# Altium PCB PCB - V-Groove.PcbDoc
Units mm, origin at the board's own origin, x right, y up, seen from the top; angles counter-clockwise.
Board outline 220 x 220 mm, 6 copper layers (Top Layer, (Inserted) Layer 2, (Inserted) Layer 3, (Inserted) Layer 4, (Inserted) Layer 5, Bottom Layer); 8 components, 0 nets, 12 pads, 0 vias.
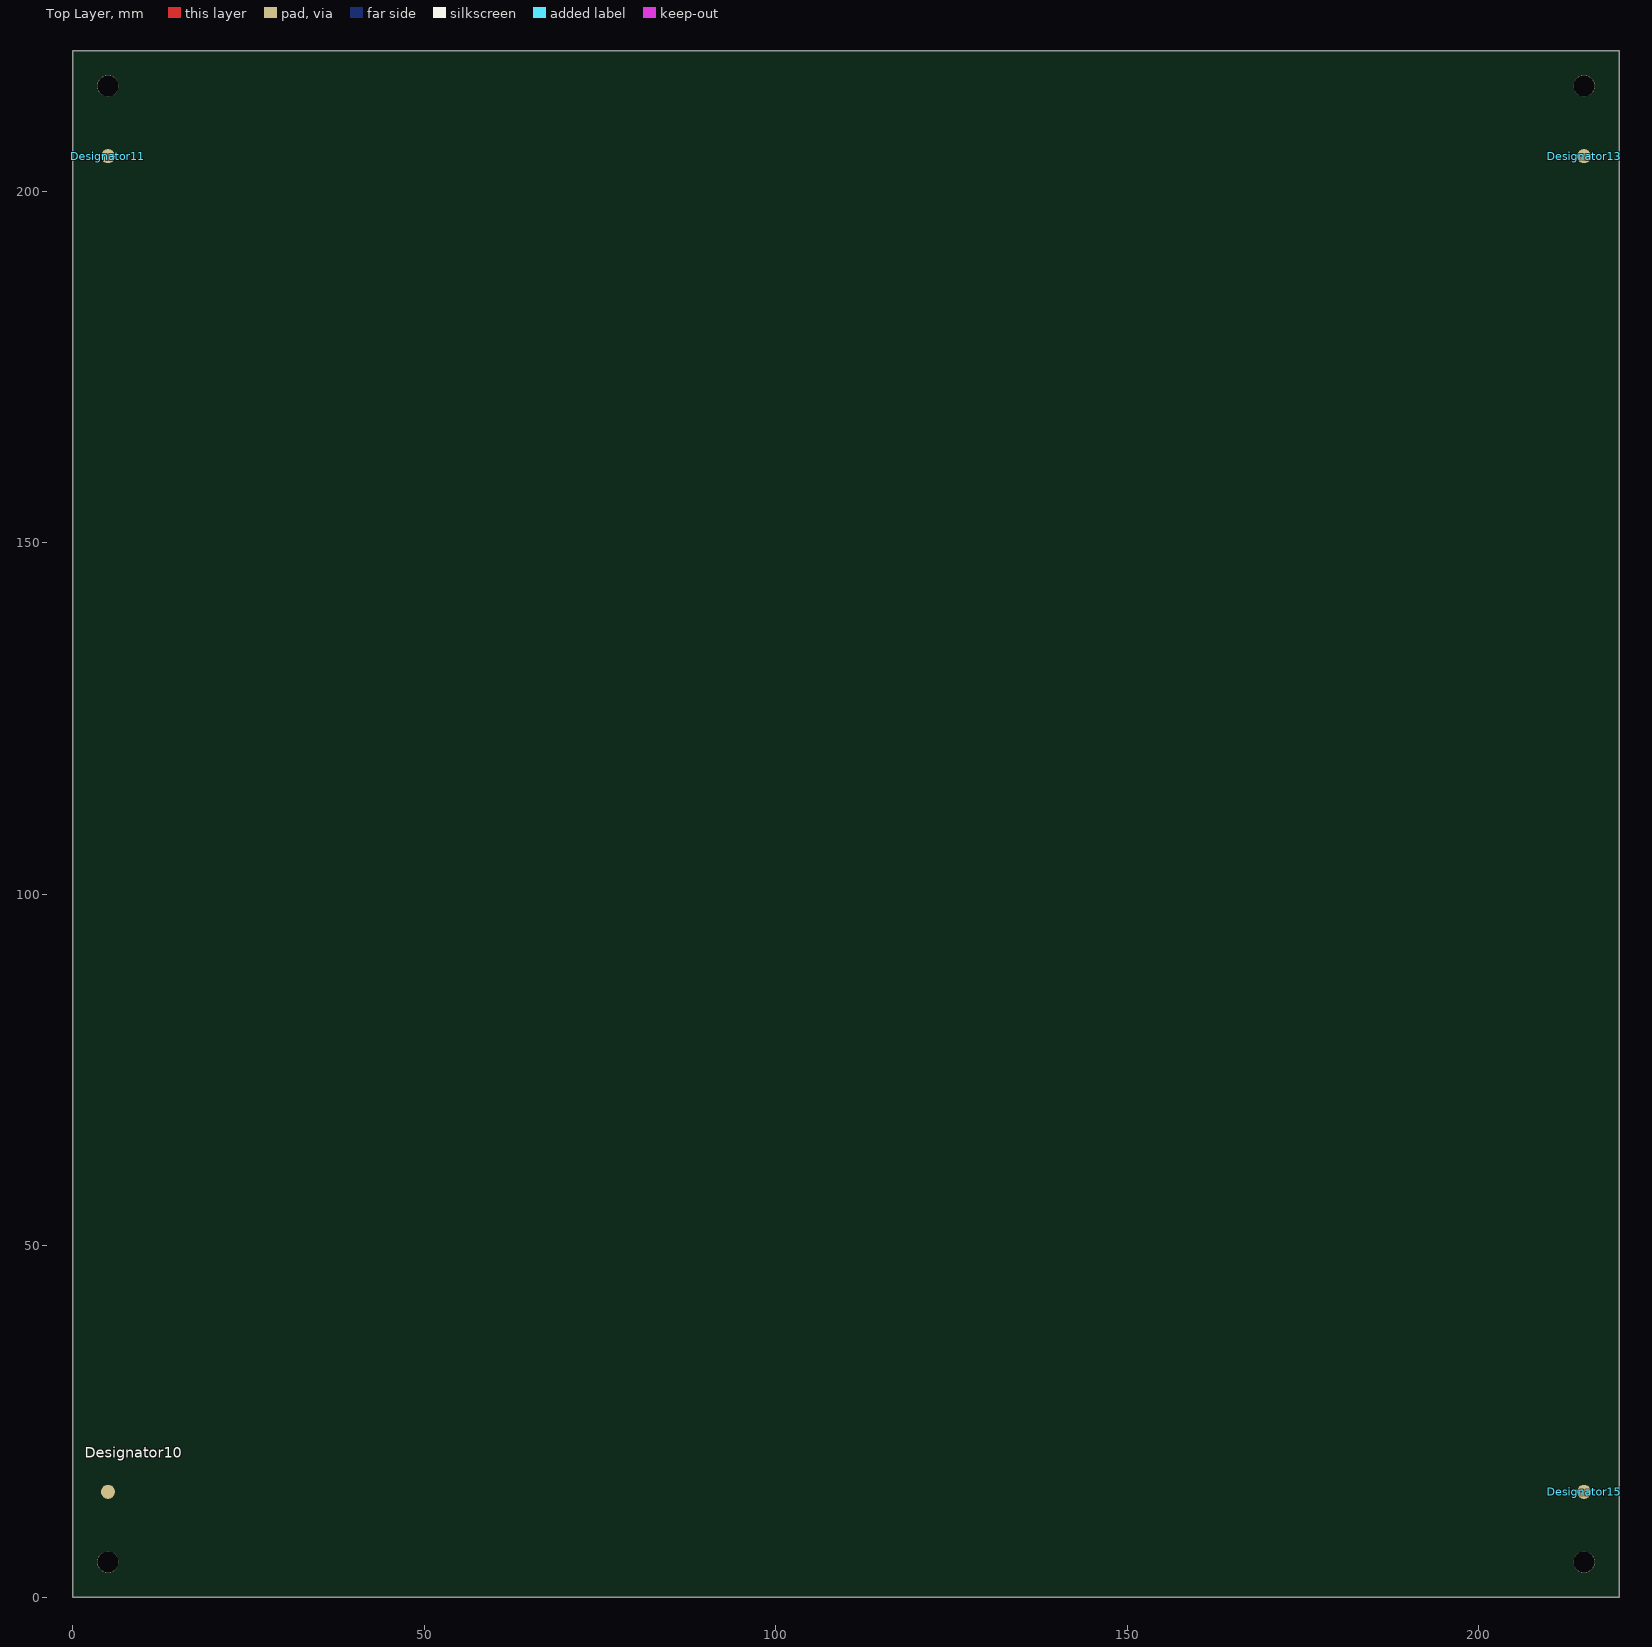
[diagram p0: Top Layer view]
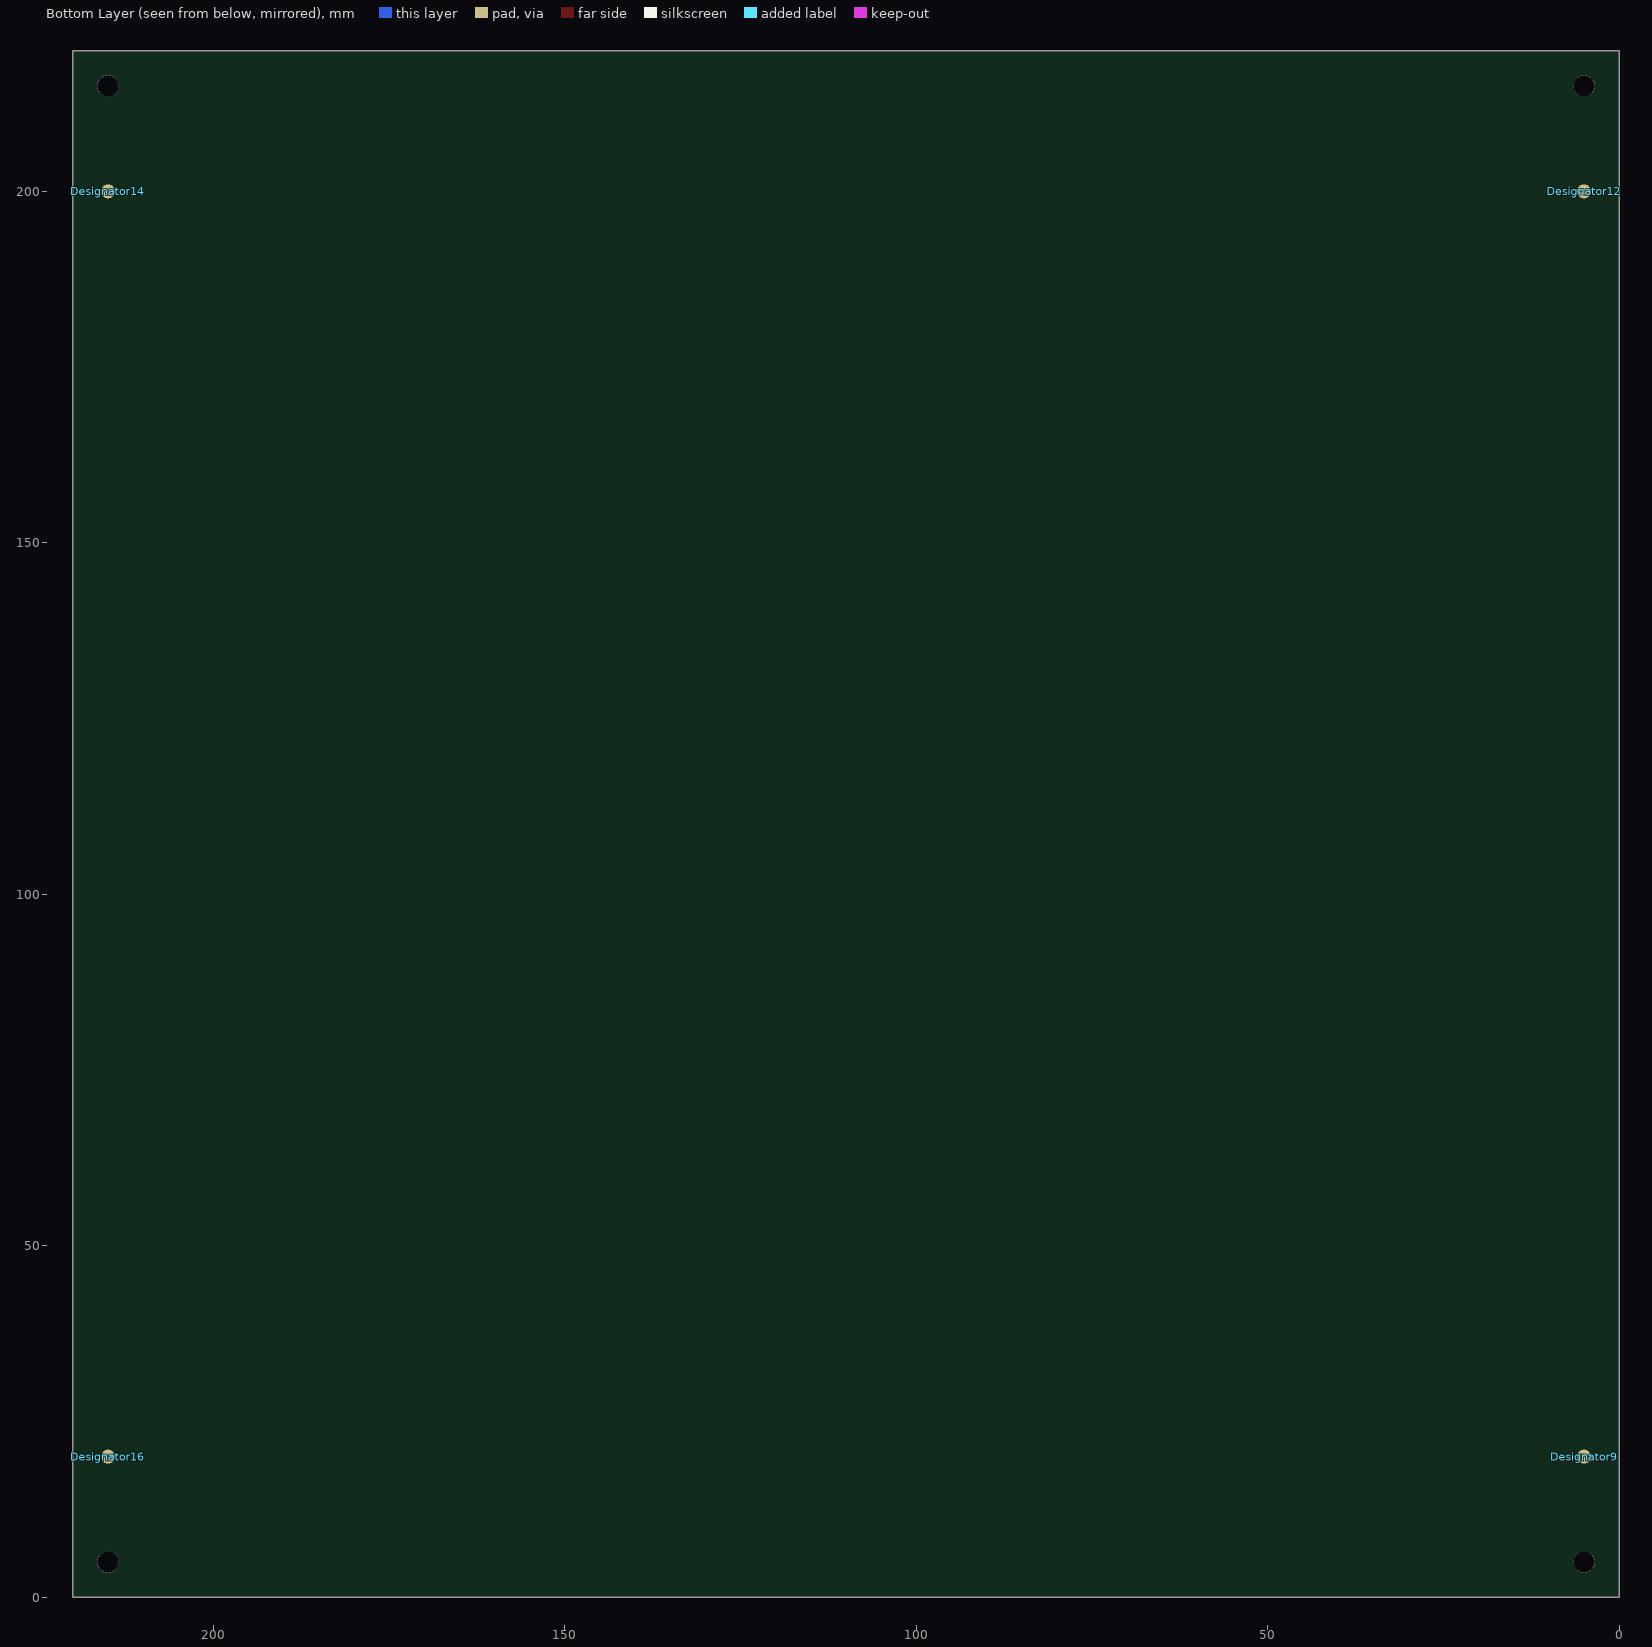
[diagram p1: Bottom Layer view, seen from below]
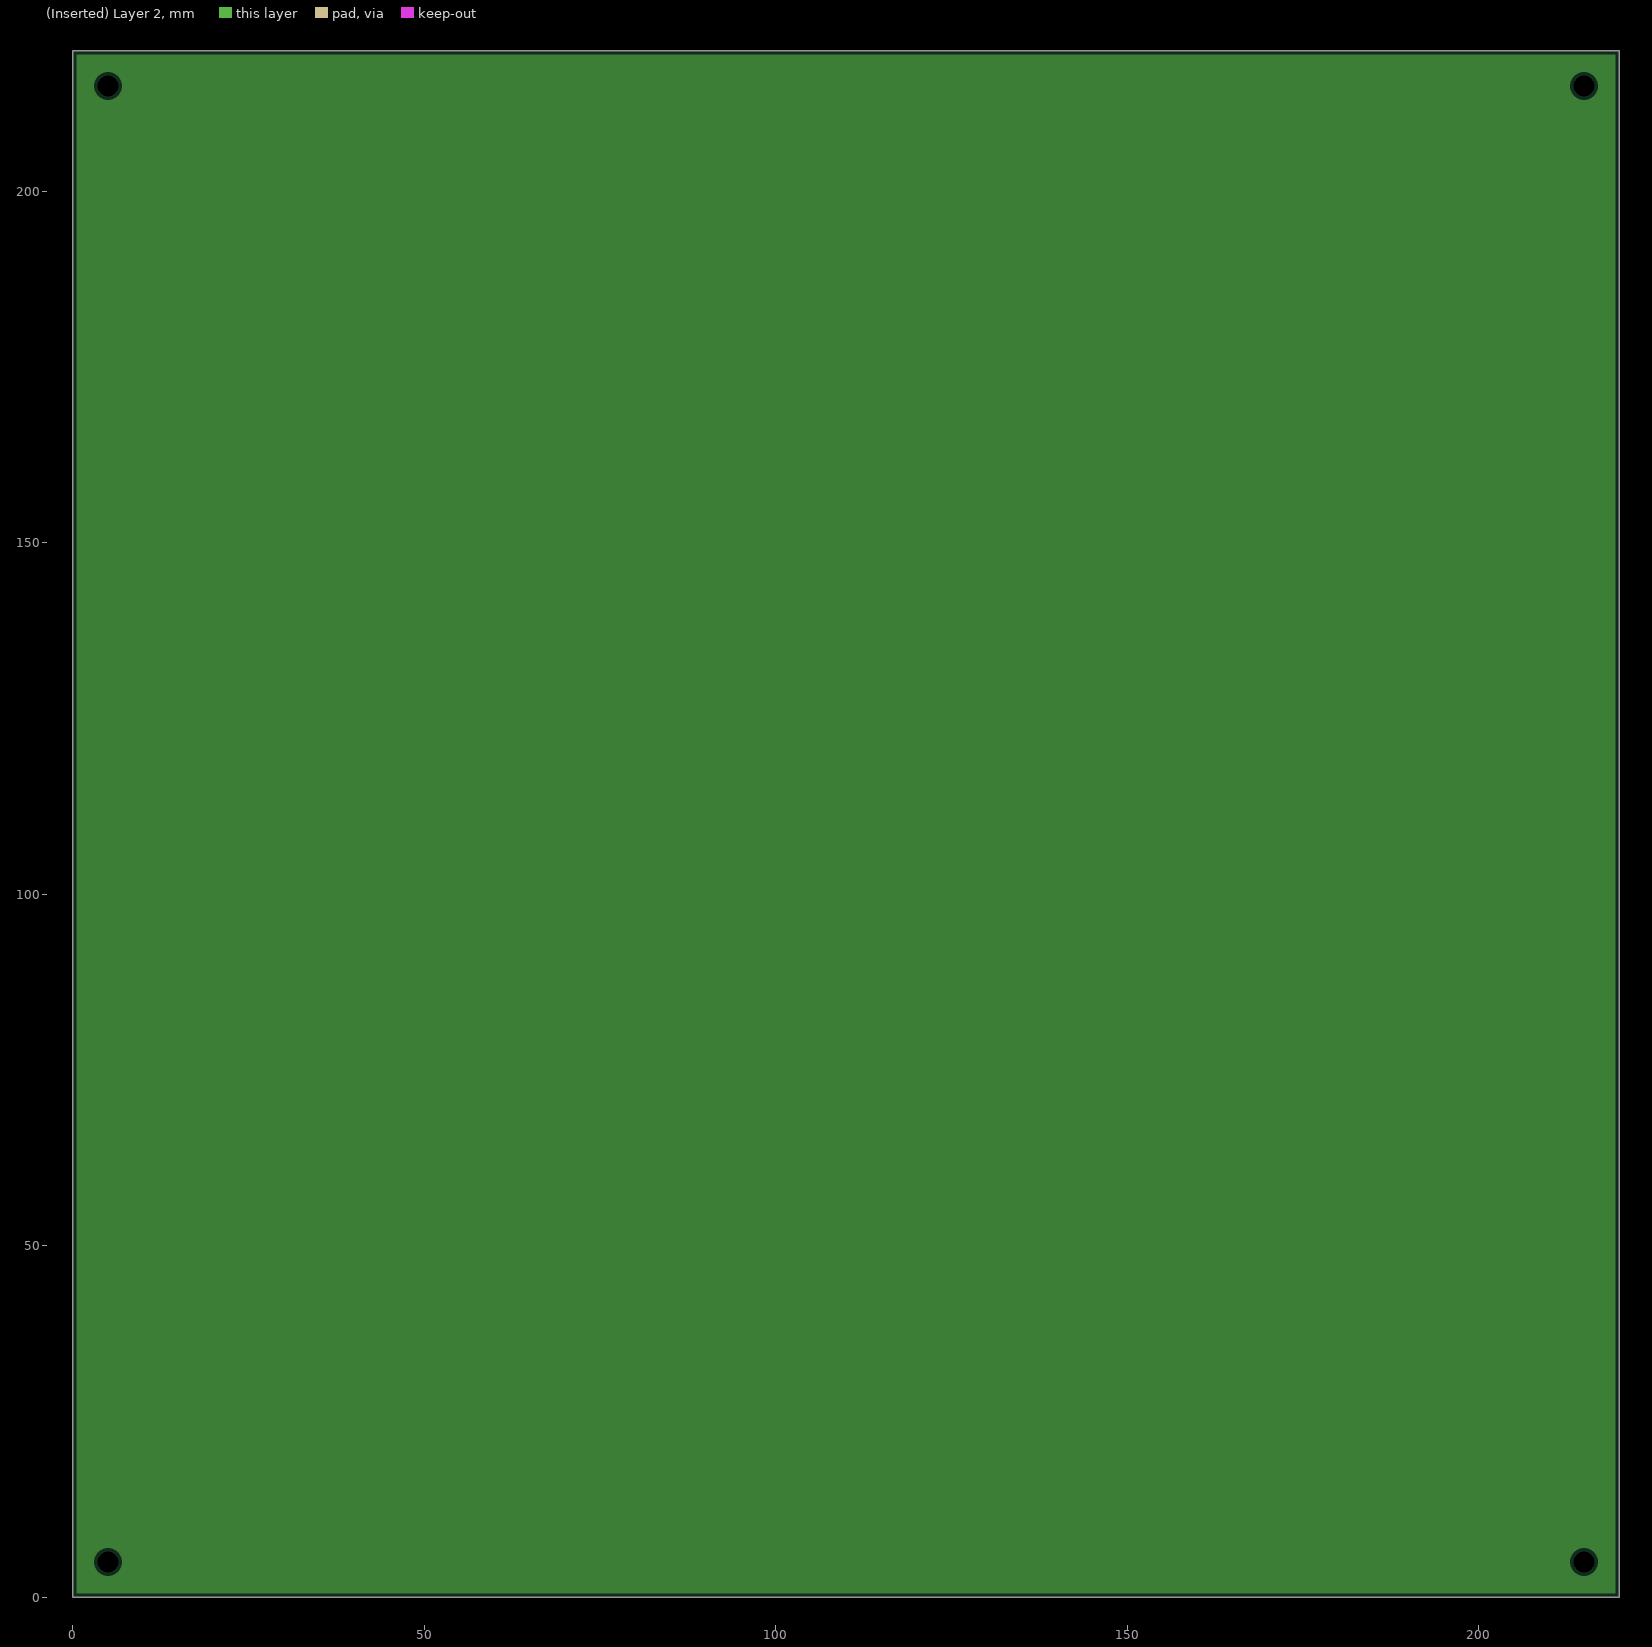
[diagram p2: (Inserted) Layer 2, clearances drawn from the general rule]
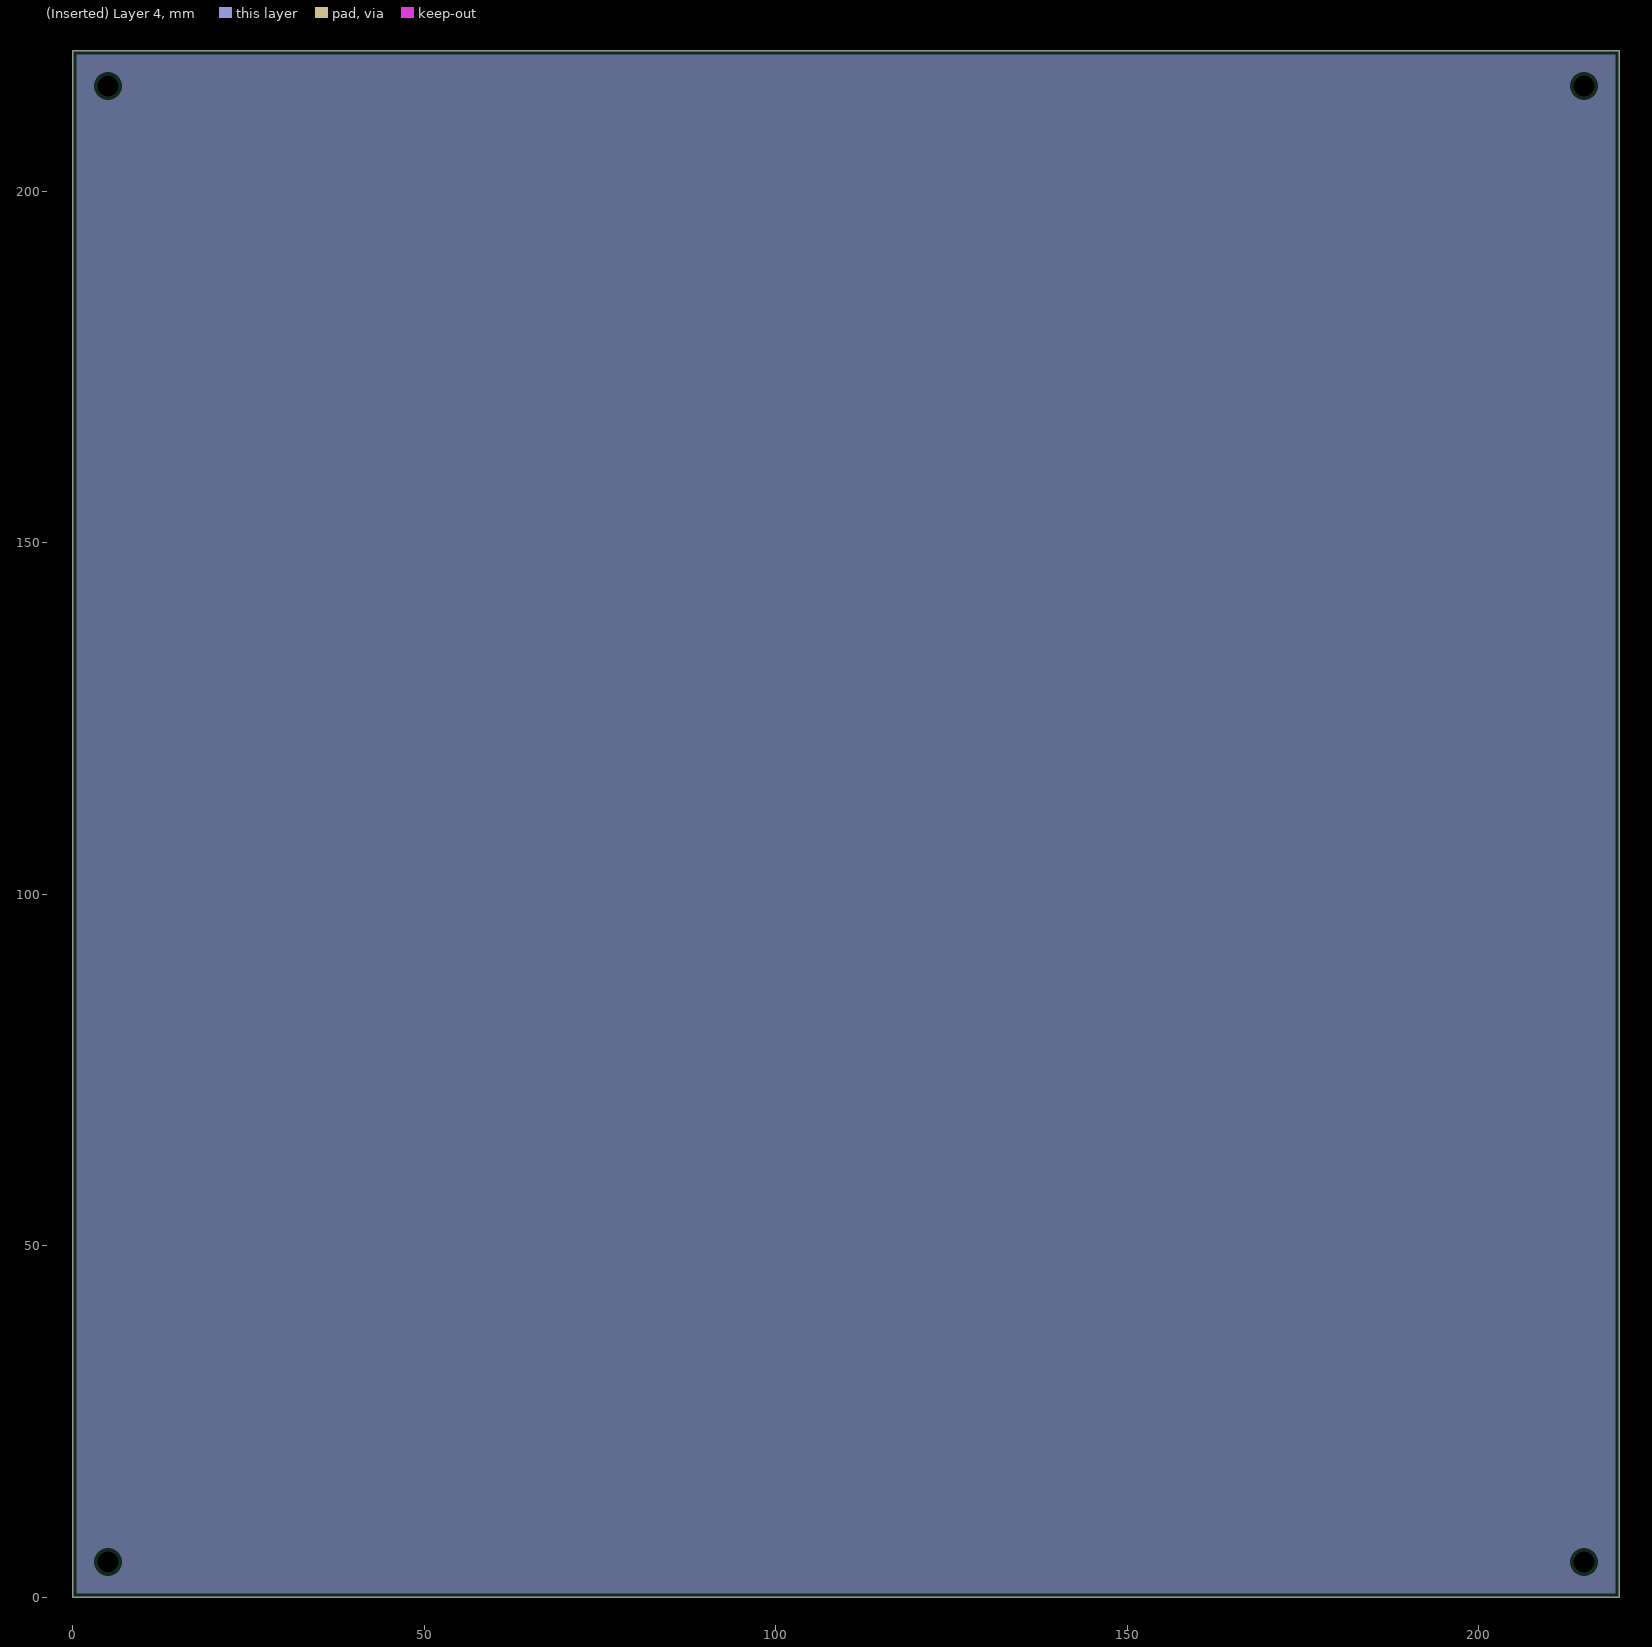
[diagram p3: (Inserted) Layer 4, clearances drawn from the general rule]
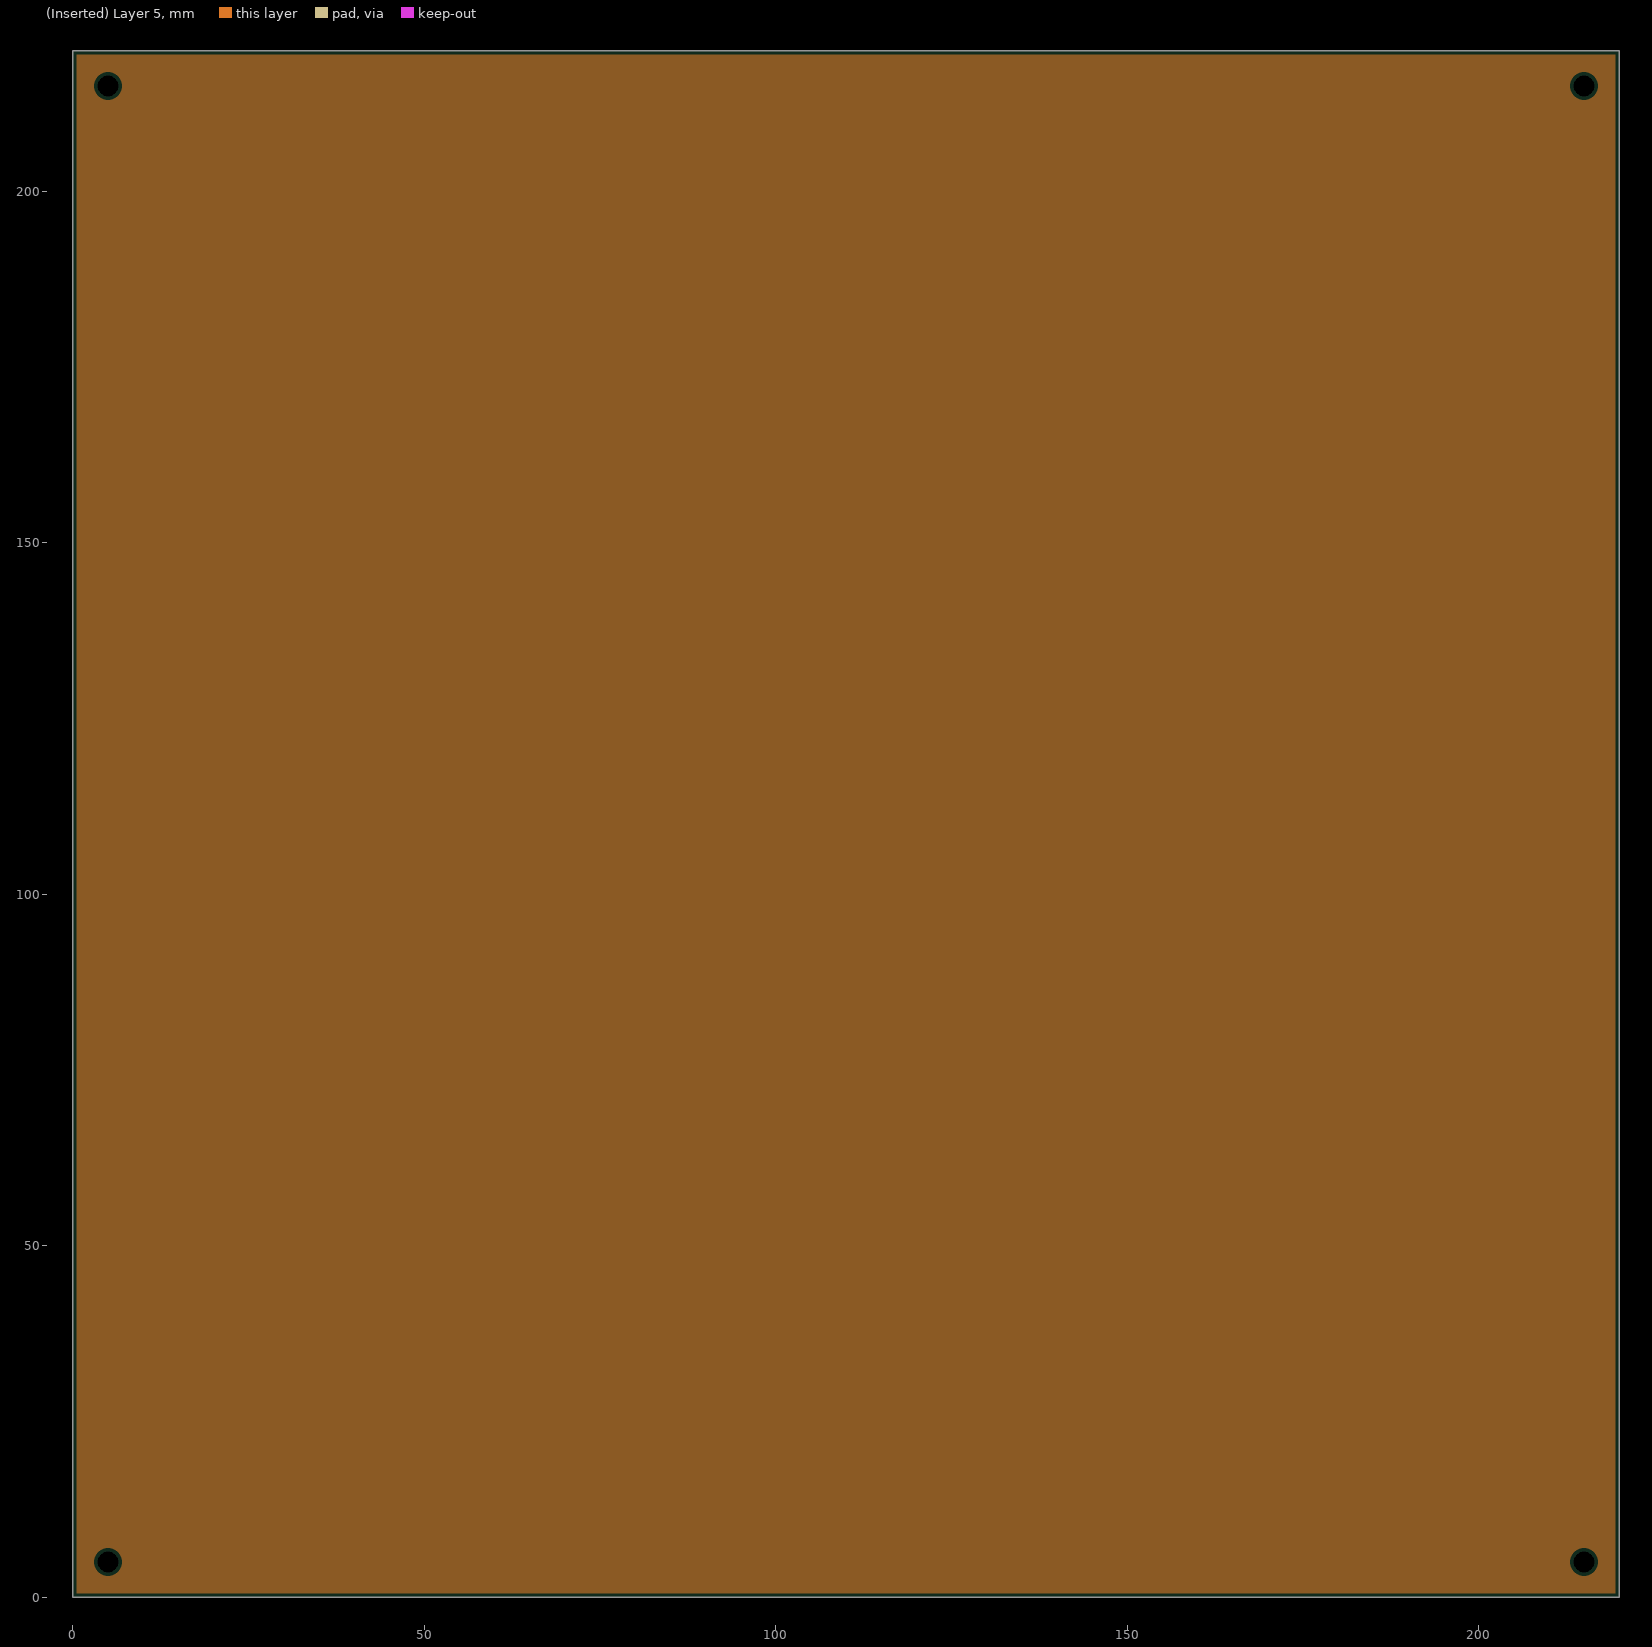
[diagram p4: (Inserted) Layer 5, clearances drawn from the general rule]

## Layer stack, top to bottom
Top Solder: solder mask 0.0102, Solder Resist, Dk 3.5
Top Layer: signal copper 0.0356
(Inserted) Dielectric 5: prepreg 0.32, FR-4, Dk 4.8
(Inserted) Layer 2: plane copper 0.0356
(Inserted) Dielectric 4: prepreg 0.32, FR-4, Dk 4.8
(Inserted) Layer 3: signal copper 0.0356
(Inserted) Dielectric 3: prepreg 0.32, FR-4, Dk 4.8
(Inserted) Layer 4: plane copper 0.0356
(Inserted) Dielectric 2: prepreg 0.32, FR-4, Dk 4.8
(Inserted) Layer 5: plane copper 0.0356
Dielectric 1: dielectric 0.32, FR-4, Dk 4.8
Bottom Layer: signal copper 0.0356
Bottom Solder: solder mask 0.0102, Solder Resist, Dk 3.5

## Board outline
0,0 220,0 220,220 0,220

## Design rules (kind name [scope] priority, off if disabled: settings)
Clearance [All] p1: gap=0.254 ignorepadtopadclearanceinfootprint=FALSE except(0: Arc-Hole Track-Hole SMDPad-Hole THPad-Hole Via-Hole Fill-Hole Poly-Hole Region-Hole Text-Hole)
PlaneClearance [All] p1: clearance=0.508
PlaneConnect [All] p1: planeconnectstyle=Relief reliefexpansion=0.508 reliefentries=4 reliefconductorwidth=0.254 reliefairgap=0.254
PolygonConnect [All] p1: connectstyle=Relief reliefconductorwidth=0.254 reliefentries=4 polygonreliefangle="90 Angle" airgapwidth=0.254
RoutingVias [All] p1: holewidth=0.711 width=1.27 viastyle="Through Hole" minholewidth=0.711 minwidth=1.27 maxholewidth=0.711 maxwidth=1.27
SolderMaskExpansion [All] p1: expansion=0.102 istentingtop=FALSE
Width [All] p1: maxlimit=0.254 minlimit=0.254 preferedwidth=0.254
28 further rules are at their usual default settings.

## Components (designator, comment, footprint, x,y, rotation, side; value= is the part's Value field where it differs from the comment)
Designator9 "Comment" "Fiducial, Panel - 2mm, 5mm" 5,20 r180 bottom
Designator10 "Comment" "Fiducial - 2mm, 5mm" 5,15 r0 top
Designator11 "Comment" "Fiducial - 2mm, 5mm" 5,205 r0 top
Designator12 "Comment" "Fiducial - 2mm, 5mm" 5,200 r180 bottom
Designator13 "Comment" "Fiducial - 2mm, 5mm" 215,205 r0 top
Designator14 "Comment" "Fiducial - 2mm, 5mm" 215,200 r180 bottom
Designator15 "Comment" "Fiducial - 2mm, 5mm" 215,15 r0 top
Designator16 "Comment" "Fiducial - 2mm, 5mm" 215,20 r180 bottom

## Footprints (in the part's own frame and the unit in brackets; to place one, negate y for a bottom-side part, rotate by r counter-clockwise, add the part's x,y. Pads: shape width x height; smd on the part's side, far side on the other; paste and mask are expansions set on the pad)
"Fiducial - 2mm, 5mm" [mm] "Fiducial - 2mm, 5mm"
  round 2 smd paste-3 mask+1.5: TP(0,0)
  Top Layer pour cut-out: 2.5,2.5 0.915,3.415 -0.915,3.415 -2.5,2.5 -2.5,2.5 -3.266,1.353 -3.536,0 -3.266,-1.353 -2.5,-2.5 -2.5,-2.5 -1.353,-3.266 0,-3.536 1.353,-3.266 2.5,-2.5 2.5,-2.5 3.415,-0.915 3.415,0.915 2.5,2.5
"Fiducial, Panel - 2mm, 5mm" [mm] "Fiducial, Panel - 2mm, 5mm"
  round 2 smd paste+0 mask+1.5: TP(0,0)
  Top Layer pour cut-out: 2.5,2.5 0.915,3.415 -0.915,3.415 -2.5,2.5 -2.5,2.5 -3.266,1.353 -3.536,0 -3.266,-1.353 -2.5,-2.5 -2.5,-2.5 -1.353,-3.266 0,-3.536 1.353,-3.266 2.5,-2.5 2.5,-2.5 3.415,-0.915 3.415,0.915 2.5,2.5

## Free pads (board coordinates)
  round 3 hole 3 unplated: 0(5,5) 0(5,215) 0(215,5) 0(215,215)

## Nets (pads, with @x,y where several pads share a name; then routed paths per layer and width w, separated by ;. In a path a pad name is that pad's centre, name@x,y a point inside that pad or via, vN(x,y) a via of type N, cw(c..) or ccw(c..) an arc to the next point about the centre after c; other vN are vias at no path point)
pads on no net: Designator9.TP Designator10.TP Designator11.TP Designator12.TP Designator13.TP Designator14.TP Designator15.TP Designator16.TP

## Polygon pours and split planes (outlines as drawn)
no net on (Inserted) Layer 2 (split plane): 219.49,0.51 0.51,0.51 0.51,219.49 219.49,219.49
no net on (Inserted) Layer 4 (split plane): 219.49,0.51 0.51,0.51 0.51,219.49 219.49,219.49
no net on (Inserted) Layer 5 (split plane): 219.49,0.51 0.51,0.51 0.51,219.49 219.49,219.49

## Silkscreen, mask and mechanical layers (free items; w line width, h text height)
V Cut:
  lines w1: 0,10 15,10 ; 0,110 15,110 ; 0,210 15,210 ; 10,0 10,15 ; 10,220 10,205 ; 110,0 110,15 ; 110,220 110,205 ; 210,0 210,15 ; 210,220 210,205 ; 220,10 205,10 ; 220,110 205,110 ; 220,210 205,210 ; 10,15 ccw(c15,15) 15,10 ; 10,15 10,105 cw(c15,105) 15,110 ; 10,205 cw(c15,205) 15,210 ; 10,205 10,115 ccw(c15,115) 15,110 ; 15,10 105,10 ccw(c105,15) 110,15 ; 15,110 105,110 ; 15,210 105,210 cw(c105,205) 110,205 ; 105,110 cw(c105,105) 110,105 ; 105,110 ccw(c105,115) 110,115 ; 110,15 ccw(c115,15) 115,10 205,10 ; 110,15 110,105 ; 110,105 cw(c115,105) 115,110 ; 110,115 ccw(c115,115) 115,110 ; 110,115 110,205 ; 110,205 cw(c115,205) 115,210 205,210 ; 115,110 205,110 ; 205,10 ccw(c205,15) 210,15 ; 205,110 cw(c205,105) 210,105 210,15 ; 205,110 ccw(c205,115) 210,115 210,205 ; 205,210 cw(c205,205) 210,205
Panel Drawing:
  circle w0.1: c113.19,-8.598 r0.212
  circle w0.1: c109.095,-8.609 r0.212
  circle w0.5: c215,205 r1
  circle w0.5: c215,200 r1
  circle w0.5: c215,215 r1.5
  circle w0.5: c215,20 r1
  circle w0.5: c215,15 r1
  circle w0.5: c5,20 r1
  circle w0.5: c5,15 r1
  circle w0.5: c5,200 r1
  circle w0.5: c5,205 r1
  circle w0.5: c5,5 r1.5
  circle w0.5: c215,5 r1.5
  circle w0.5: c5,215 r1.5
  lines w0.15: 80,-25 116,-25 ; 80,-15 116,-15
  lines w0.25: 89.5,-33.5 90,-34.5 90.5,-33.5 ; 89.5,-26 90,-25 ; 89.5,-24 90,-25 ; 89.5,-16 90,-15 ; 89.5,-14 90,-15 ; 89.5,-6.5 90,-5.5 90.5,-6.5 ; 90.5,-26 90,-25 ; 90.5,-24 90,-25 ; 90.5,-16 90,-15 ; 90.5,-14 90,-15
  lines w0.254: 107,-12 cw(c110,-15) 113,-12
  lines w0.3: 90,-35 90,-25 90,-15 90,-5 ; 139.3,-32.9 140,-35 ; 139.3,-7.1 140,-5 ; 140.7,-32.9 140,-35 ; 140.7,-7.1 140,-5 ; 140,-35 140,-5
  lines w1: 80,-35 100,-35 110,-25 ; 80,-5 100,-5 110,-15 120,-5 145,-5 ; 145,-35 120,-35 110,-25 ; 110,-25 110,-25 ; 0,0 0,220 220,220 220,0 0,0
  text "x12" at 215,224.5 h3
  text "x4" at 234,216.5 h3
  text "x4" at 23,216 h3
  text "x4" at 234,209 h3
  text "x4" at 234,201.5 h3
  text "5  x16" at 121.834,112.823 h3
  text "All units are in millimeters." at 14.999,3.031 h3
  text "20 ~ 60" at 106.998,-9.979 h2
  text "H/3" at 90.5,-11.465 h3
  text "H/3" at 90.5,-20.965 h3
  text "H = 1.6" at 141,-20.968 h3
  text "H/3" at 90.5,-30.465 h3
  text "V-SCORE / PANELIZATION" at 90.585,-50 h6

## Dimensions
111,112 to 117.496,112 on Panel Drawing
110,205 to 10,171 on Panel Drawing
5,215 to 11.496,215 on Panel Drawing
0,220 to 0,0 on Panel Drawing
220,220 to 0,220 on Panel Drawing
10,205 to 0,220 on Panel Drawing
91,220 to 105,210 on Panel Drawing
216,205 to 216,200 on Panel Drawing
216.5,215 to 216,205 on Panel Drawing
220,220 to 216.5,215 on Panel Drawing
215,217.5 to 220,215 on Panel Drawing
180,110 to 10,10 on Panel Drawing

## Panel: embedded boards
"..\..\PCB - PCBWAY.PcbDoc" at 10,10, 2 rows x 2 columns, spacing 100 x 100, rotation 0